# Altium PCB UniversalFullBridge.PcbDoc
Units mm, origin at the board's own origin, x right, y up, seen from the top; angles counter-clockwise.
Board outline 137.92 x 67.82 mm, 2 copper layers (Top Layer, Bottom Layer); 64 components, 35 nets, 404 pads, 38 vias.
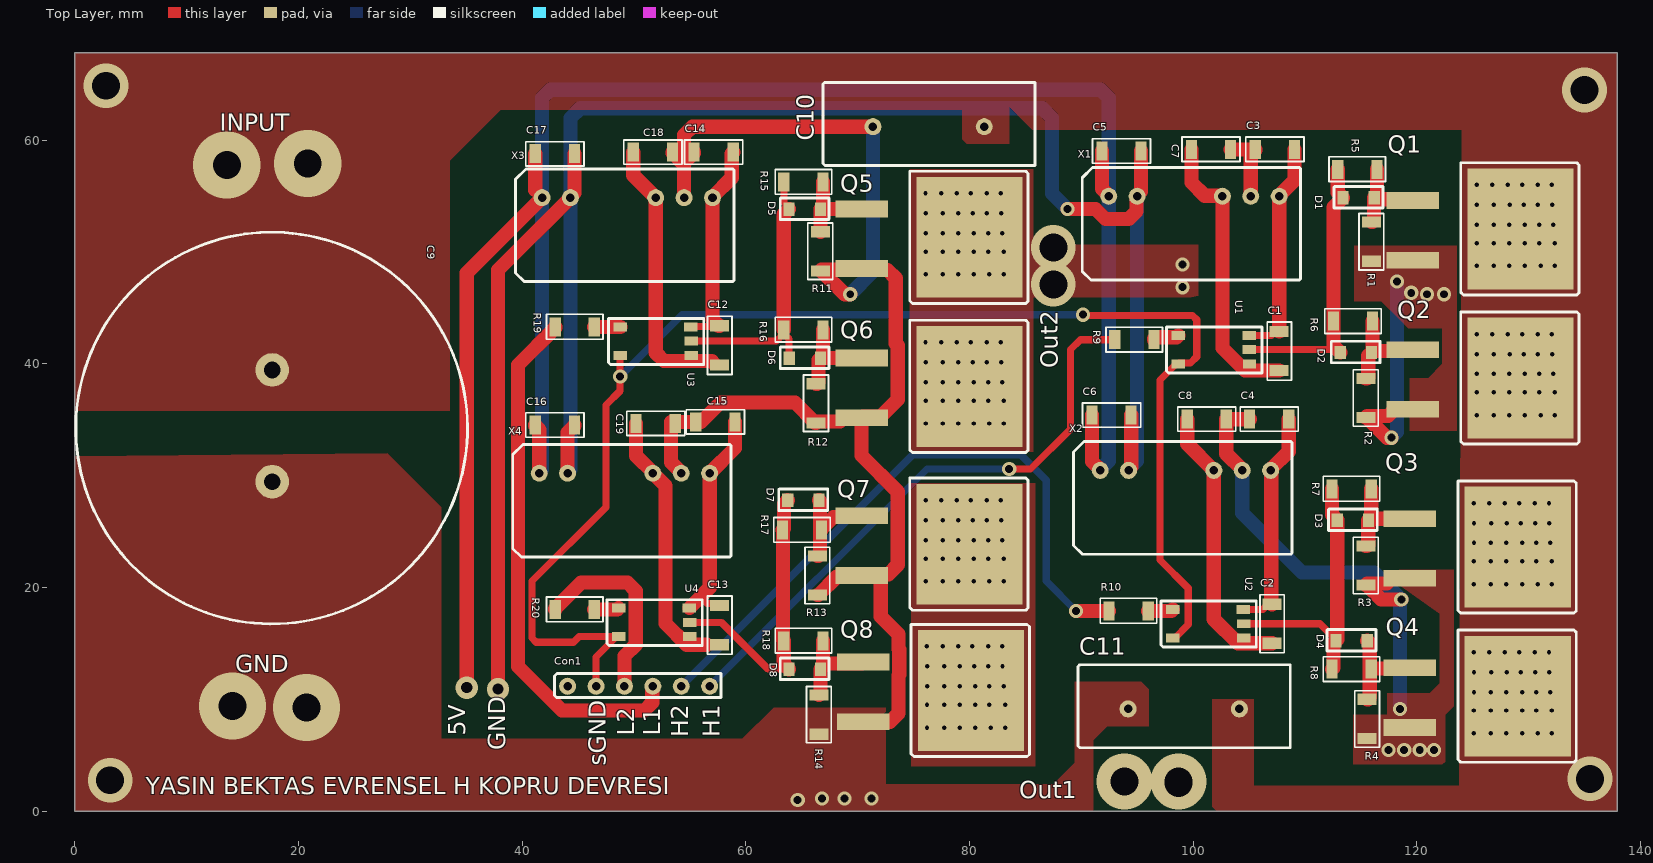
[diagram p0: Top Layer view]
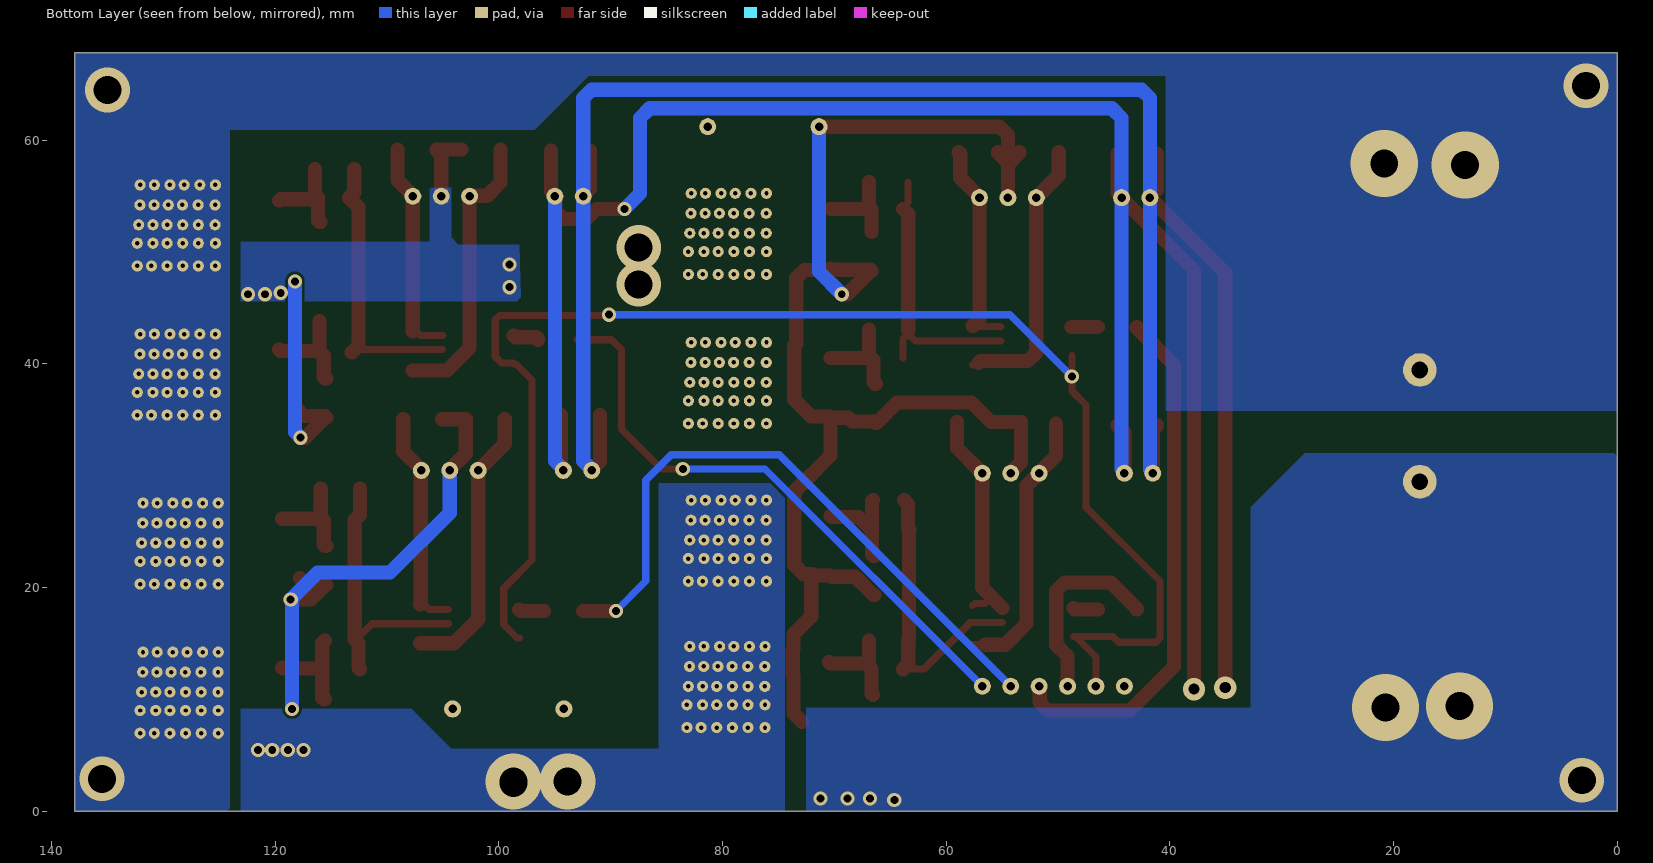
[diagram p1: Bottom Layer view, seen from below]
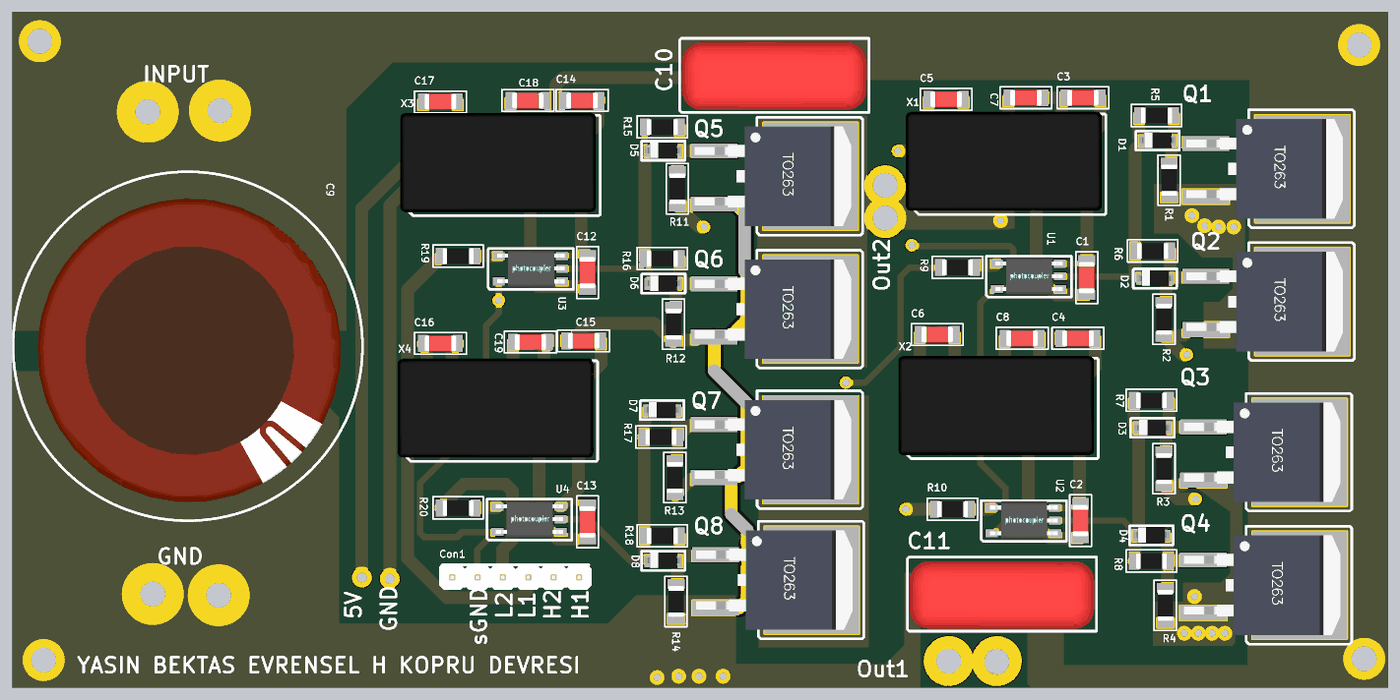
[diagram p2: 3D render of the assembled board from above, using the file's embedded part models]

## Layer stack, top to bottom
Top Solder: solder mask 0.0102, Solder Resist, Dk 3.5
Top Layer: signal copper 0.0356
Dielectric 1: dielectric 0.32, FR-4, Dk 4.8
Bottom Layer: signal copper 0.0356
Bottom Solder: solder mask 0.0102, Solder Resist, Dk 3.5

## Board outline
0,0 0,67.818 137.922,67.818 137.922,0

## Design rules (kind name [scope] priority, off if disabled: settings)
Clearance [All] p1: gap=0.254 ignorepadtopadclearanceinfootprint=FALSE except(0: Arc-Hole Track-Hole SMDPad-Hole THPad-Hole Via-Hole Fill-Hole Poly-Hole Region-Hole Text-Hole)
Height [All] p1: minheight=0 maxheight=2539.975 prefheight=12.7
PolygonConnect [All] p1: connectstyle=Direct reliefconductorwidth=0.254 reliefentries=4 polygonreliefangle="90 Angle" airgapwidth=0.254
RoutingVias [All] p1: holewidth=0.711 width=1.27 viastyle="Through Hole" minholewidth=0.711 minwidth=1.27 maxholewidth=0.711 maxwidth=1.27
SolderMaskExpansion [All] p1: expansion=0.102 istentingtop=FALSE
Width [All] p1: maxlimit=254 minlimit=0.254 preferedwidth=0.254 bottomlayer_maxwidth=25.4 minimp=50.000000 maximp=50.000000 favimp=50.000000
29 further rules are at their usual default settings.

## Components (designator, comment, footprint, x,y, rotation, side; value= is the part's Value field where it differs from the comment)
C1 "uF" C-1206W 107.696,41.148 r270 top
C2 "uF" C-1206W 107.061,16.764 r270 top
C3 "uF" C-1206W 107.315,59.182 r0 top
C4 "uF" C-1206W 106.807,35.052 r0 top
C5 "uF" C-1206W 93.599,59.055 r180 top
C6 "uF" C-1206W 92.71,35.433 r180 top
C7 "uF" C-1206W 101.6,59.182 r0 top
C8 "uF" C-1206W 101.219,35.052 r0 top
C9 "600v 220uF Capacitor" "600v Capacitor" 17.653,39.464 r270 top
C10 "Bulk Film Cap" "Bulk cappacitor" 81.324,61.214 r180 top
C11 "Bulk Film Cap" "Bulk cappacitor" 104.14,9.144 r180 top
C12 "uF" C-1206W 57.658,41.656 r270 top
C13 "uF" C-1206W 57.658,16.637 r270 top
C14 "uF" C-1206W 57.122,58.928 r0 top
C15 "uF" C-1206W 57.277,34.798 r0 top
C16 "uF" C-1206W 42.926,34.544 r180 top
C17 "uF" C-1206W 42.926,58.801 r180 top
C18 "uF" C-1206W 51.689,58.928 r0 top
C19 "uF" C-1206W 51.943,34.671 r0 top
Con1 "5 pin connector" pinheader 56.769,11.176 r180 top
D1 "B5819" B5819 113.405,54.864 r0 top
D2 "B5819" B5819 113.151,41.021 r0 top
D3 "B5819" B5819 112.897,26.035 r0 top
D4 "B5819" B5819 112.776,15.24 r0 top
D5 "B5819" B5819 63.875,53.848 r0 top
D6 "B5819" B5819 63.881,40.513 r0 top
D7 "B5819" B5819 63.754,27.813 r0 top
D8 "B5819" B5819 63.875,12.7 r0 top
Q1 "To263Mosfet" To263Mosfet 119.634,54.61 r0 top
Q2 "To263Mosfet" To263Mosfet 119.634,41.275 r0 top
Q3 "To263Mosfet" To263Mosfet 119.38,26.162 r0 top
Q4 "To263Mosfet" To263Mosfet 119.38,12.827 r0 top
Q5 "To263Mosfet" To263Mosfet 70.355,53.858 r0 top
Q6 "To263Mosfet" To263Mosfet 70.355,40.523 r0 top
Q7 "To263Mosfet" To263Mosfet 70.358,26.416 r0 top
Q8 "To263Mosfet" To263Mosfet 70.485,13.335 r0 top
R1 "R-1206" R-1206W 115.951,50.927 r90 top
R2 "R-1206" R-1206W 115.443,36.957 r90 top
R3 "R-1206" R-1206W 115.443,21.971 r90 top
R4 "R-1206" R-1206W 115.57,8.255 r90 top
R5 "R-1206" R-1206W 114.681,57.404 r0 top
R6 "R-1206" R-1206W 114.3,43.815 r0 top
R7 "R-1206" R-1206W 114.173,28.829 r0 top
R8 "R-1206" R-1206W 114.173,12.7 r0 top
R9 "R-1206" R-1206W 94.742,42.164 r0 top
R10 "R-1206" R-1206W 94.234,17.907 r0 top
R11 "R-1206" R-1206W 66.675,50.066 r90 top
R12 "R-1206" R-1206W 66.294,36.477 r90 top
R13 "R-1206" R-1206W 66.421,21.082 r90 top
R14 "R-1206" R-1206W 66.548,8.636 r90 top
R15 "R-1206" R-1206W 65.151,56.261 r0 top
R16 "R-1206" R-1206W 65.151,43.053 r0 top
R17 "R-1206" R-1206W 65.024,25.146 r0 top
R18 "R-1206" R-1206W 65.151,15.24 r0 top
R19 "R-1206" R-1206W 44.704,43.307 r0 top
R20 "R-1206" R-1206W 44.704,18.034 r0 top
U1 "TLP152" tlp152 98.679,42.545 r270 top
U2 "TLP152" tlp152 98.171,18.034 r270 top
U3 "TLP152" tlp152 48.768,43.307 r270 top
U4 "TLP152" tlp152 48.63,18.161 r270 top
X1 "5/20-5" "sip7DCDC converter" 92.456,54.991 r0 top
X2 "5/20-5" "sip7DCDC converter" 91.694,30.48 r0 top
X3 "5/20-5" "sip7DCDC converter" 41.783,54.864 r0 top
X4 "5/20-5" "sip7DCDC converter" 41.529,30.226 r0 top

## Footprints (in the part's own frame and the unit in brackets; to place one, negate y for a bottom-side part, rotate by r counter-clockwise, add the part's x,y. Pads: shape width x height; smd on the part's side, far side on the other; paste and mask are expansions set on the pad)
"600v Capacitor" [mm]
  round 3 hole 1.5: 1(0,0) 2(10,0)
  silkscreen extent -12.31,-17.56 22.71,17.46, body extent -15.93,-21.43 27.18,21.68, height 49.61
B5819 [mm]
  rect 1x1.2 smd: 1(0,0) 2(2.8,0)
  silkscreen extent -0.8,-0.92 3.57,1, body extent -0.45,-0.72 3.25,0.88, height 1.28
"Bulk cappacitor" [mil]
  round 60 hole 30: 1(0,0) 2(391.73,0)
  silkscreen extent -179,-156 568,137, body extent -169,-140 559,128, height 872
C-1206W [mm] "capacitor 1206 wave soldering"
  rect 1x1.7 smd: 1(-1.75,0) 2(1.75,0)
  silkscreen extent -2.6,-1.07 2.6,1.1, body extent -1.6,-0.8 1.6,0.8, height 1
pinheader [mil]
  round 60 hole 30: 1(0,0) 2(100,0) 3(200,0) 4(300,0) 5(400,0) 6(500,0)
  silkscreen extent -40,-45 546,39, body extent -51,-45 549,53, height 312
R-1206W [mm] "resistor 1206 wave soldering"
  rect 1x1.7 smd: 1(-1.75,0) 2(1.75,0)
  silkscreen extent -2.52,-1.1 2.52,1.12, body extent -1.55,-0.77 1.55,0.78, height 0.55
"sip7DCDC converter" [mil]
  round 60 hole 30: 1(0,0) 2(100,0) 5(400,0) 6(500,0) 7(600,0)
  silkscreen extent -94,-295 675,101, body extent -114,-281 659,110, height 499
tlp152 [mm]
  rect 0.8x1.2 smd: 1(0,0) 3(2.54,0) 4(2.54,6.361) 5(1.27,6.349) 6(0,6.324)
  silkscreen extent -0.75,-1.05 3.35,7.47, body extent -0.65,-0.16 3.15,6.61, height 2.11
To263Mosfet [mm]
  rect 4.7x1.5 smd: 1(0,0) 3(0,-5.334)
  round 1 hole 0.4: 2(5.715,1.397) 2(5.718,-5.852) 2(5.718,-3.82) 2(5.739,-2.169) 2(5.739,-0.391) 2(7.112,1.397) 2(7.242,-5.852) 2(7.242,-3.82) 2(7.242,-2.169) 2(7.263,-0.391) 2(8.509,1.397) 2(8.639,-5.852) 2(8.639,-3.82) 2(8.639,-2.169) 2(8.66,-0.391) 2(9.779,1.397) 2(9.93,-0.391) 2(10.036,-5.852) 2(10.036,-3.82) 2(10.036,-2.169) 2(11.176,1.397) 2(11.2,-0.391) 2(11.306,-3.82) 2(11.306,-2.169) 2(11.433,-5.852) 2(12.446,1.397) 2(12.47,-0.391) 2(12.576,-2.169) 2(12.703,-5.852) 2(12.703,-3.82)
  rect 9.5x10.8 smd: 2(9.652,-2.54)
  silkscreen extent 4.3,-8.45 14.87,3.37, body extent -1.94,-7.54 13.73,2.46, height 4.81

## Part data
C1 C2 C3 C4 C5 C6 C7 C8 C12 C13 C14 C15 C16 C17 C18 C19: library part C-1206
C10 C11: library part "3300pF Bulk Capacitor"
R1 R2 R3 R4 R5 R6 R7 R8 R9 R10 R11 R12 R13 R14 R15 R16 R17 R18 R19 R20: "Res1206"
X1 X2 X3 X4: library part "DC/DC Coınverter"

## Via types
v1: diameter 1.27, hole 0.711, Top Layer to Bottom Layer, 23 vias
v2: diameter 4, hole 2.5, Top Layer to Bottom Layer, 7 vias
v3: diameter 6, hole 2.5, Top Layer to Bottom Layer, 4 vias
v4: diameter 2, hole 1, Top Layer to Bottom Layer, 2 vias
v5: diameter 5, hole 2.5, Top Layer to Bottom Layer, 2 vias

## Nets (pads, with @x,y where several pads share a name; then routed paths per layer and width w, separated by ;. In a path a pad name is that pad's centre, name@x,y a point inside that pad or via, vN(x,y) a via of type N, cw(c..) or ccw(c..) an arc to the next point about the centre after c; other vN are vias at no path point)
5vGND: C5.1 C6.1 C16.1 C17.1 X1.2 X2.2 X3.2 X4.2 | length 181.9
  Top Layer w1.27: v4(37.846,10.922) 37.846,48.387 X3.2 44.323,54.933 44.676,55.286 C17.1 ; X4.2 44.069,33.857 44.676,34.464 C16.1 ; v1(88.773,53.848) 91.264,53.848 92.153,52.959 94.252,52.959 94.947,53.654 94.947,54.942 X1.2 94.996,55.06 95.349,55.413 C5.1 ; X2.2 94.234,30.549 94.46,30.775 C6.1
  Bottom Layer w1.27: X4.2 44.069,30.295 44.323,30.549 X3.2 44.323,61.994 45.194,62.865 86.514,62.865 87.385,61.994 87.385,55.236 v1(88.773,53.848) ; X2.2 94.234,30.549 94.996,31.311 X1.2
+5v: C5.2 C6.2 C16.2 C17.2 X1.1 X2.1 X3.1 X4.1 | length 182.4
  Top Layer w1.27: v4(35.052,11.049) 35.052,48.133 X3.1 ; C16.2 41.176,34.464 41.529,34.111 X4.1 ; 41.176,55.54 C17.2 ; C6.2 90.96,31.283 91.694,30.549 X2.1 ; C5.2 91.849,55.667 92.456,55.06 X1.1
  Bottom Layer w1.27: X4.1 41.529,30.295 41.783,30.549 X3.1 41.783,63.772 42.527,64.516 91.712,64.516 92.456,63.772 X1.1 92.456,31.311 91.694,30.549 X2.1
-5v1: C1.2 C7.1 U1.4 X1.5 | length 25.7
  Top Layer w1.27: C7.1 99.85,56.233 101.043,55.04 102.567,55.04 X1.5 102.616,41.43 104.648,39.398 C1.2
-5v2: C2.2 C8.1 U2.4 X2.5 | length 25
  Top Layer w1.27: C8.1 99.469,32.865 X2.5 101.854,17.173 104.013,15.014 C2.2
-5v3: C12.2 C18.1 U3.4 X3.5 | length 24.9
  Top Layer w0.635: C12.2@57.125,40.089 57.308,39.906 C12.2
  Top Layer w1.27: C18.1 49.939,56.868 X3.5 51.943,41.003 52.687,40.259 56.955,40.259 C12.2@57.125,40.089
-5v4: C13.2 C19.1 U4.4 X4.5 | length 24.6
  Top Layer w0.635: 56.515,14.887 C13.2
  Top Layer w1.27: C19.1 50.193,31.791 51.689,30.295 X4.5 52.819,29.096 52.819,16.794 54.726,14.887 56.515,14.887
Com1: C3.1 C7.2 Q1.3 Q2.3 Q5.2 Q6.2 R1.1 R2.1 X1.6 | length 26.7
  Top Layer w1.27: C7.2 C3.1 105.565,59.102 105.156,58.693 X1.6 ; v1(117.729,33.401) 117.329,33.401 115.523,35.207 R2.1 115.578,35.342 117.435,35.342 Q2.3@118.034,35.941
  Bottom Layer w1.27: v1(117.729,33.401) 118.237,33.909 v1(118.237,47.371)
  other v1: 120.904,46.228 122.428,46.228 119.507,46.355 99.06,46.863 99.06,48.895
  other v2: 87.503,47.117 87.503,50.419
Com2: C4.1 C8.2 Q3.3 Q4.3 Q7.2 Q8.2 R3.1 R4.1 X2.6 | length 44.6
  Top Layer w1.27: X2.6 104.394,30.549 102.969,31.974 C8.2 C4.1 ; Q3.3@117.78,20.828 117.308,20.356 115.578,20.356 R3.1 115.523,20.221 116.821,18.923 v1(118.618,18.923)
  Bottom Layer w1.27: X2.6 104.394,26.67 109.728,21.336 116.205,21.336 v1(118.618,18.923) 118.491,18.796 v1(118.491,9.144)
  other v1: 117.475,5.461 118.872,5.461 120.269,5.461 121.539,5.461
  other v2: 98.679,2.54
  other v5: 93.853,2.667 98.679,2.667
GND: C9.2 C10.2 C11.2 C14.1 C15.1 C18.2 C19.2 Q5.3 Q6.3 Q7.3 Q8.3 R11.1 R12.1 R13.1 R14.1 X3.6 X4.6 | length 127.6
  Top Layer w1.27: C18.2 53.439,58.848 54.483,57.804 ; X4.6 54.229,30.295 53.312,31.212 53.312,34.798 C15.1 55.987,34.798 57.726,36.537 64.404,36.537 66.214,34.727 R12.1 66.429,34.862 68.428,34.862 68.755,35.189 Q6.3 ; X3.6 54.483,57.804 ; C14.1 55.372,58.848 54.483,57.959 ; R13.1 66.501,19.332 68.136,20.967 70.243,20.967 Q7.3 71.958,21.082 72.073,20.967 72.073,17.417 73.66,15.83 73.66,14.517 73.724,14.453 73.724,12.217 73.66,12.153 73.66,8.763 72.898,8.001 ; v1(69.342,46.228) 68.843,46.228 66.755,48.316 R11.1 66.779,48.42 70.251,48.42 Q5.3 70.47,48.409 72.662,48.409 73.406,47.665 73.406,41.829 73.594,41.641 73.594,36.828 72.07,35.304 70.47,35.304 Q6.3 ; C10.2 55.227,61.214 54.483,60.47 54.483,57.959 ; Q7.3@71.958,21.197 72.759,21.197 73.597,22.035 73.597,28.565 70.355,31.807 Q6.3 ; 54.483,57.804 54.483,57.959
  Bottom Layer w1.27: v1(69.342,46.228) 71.374,48.26 C10.2
  other v1: 64.643,1.016 66.802,1.143 68.834,1.143 71.247,1.143
  other v2: 3.164,2.77
  other v3: 20.701,9.271 14.097,9.398
H1: Con1.1 R9.1 | length 53.2
  Top Layer w0.635: v1(83.555,30.607) 85.471,30.607 89.027,34.163 89.027,41.275 89.916,42.164 R9.1
  Bottom Layer w0.635: Con1.1 76.2,30.607 v1(83.555,30.607)
H2: Con1.2 R10.1 | length 57.9
  Top Layer w1.27: v1(89.535,17.907) R10.1
  Bottom Layer w0.635: Con1.2 74.93,31.877 84.591,31.877 86.868,29.6 86.868,20.574 v1(89.535,17.907)
L1: Con1.3 R19.1 | length 47.2
  Top Layer w1.27: R19.1 42.954,43.227 39.624,39.897 39.624,12.954 43.561,9.017 50.945,9.017 51.64,9.712 51.64,11.127 Con1.3
L2: Con1.4 R20.1 | length 17.5
  Top Layer w1.27: R20.1 42.954,18.114 45.287,20.447 49.41,20.447 50.154,19.703 50.154,14.888 49.149,13.883 Con1.4
NetC1_1: C1.1 C3.2 U1.6 X1.7 | length 19.7
  Top Layer w0.635: U1.6 106.993,42.545 107.346,42.898 C1.1
  Top Layer w1.27: C1.1 X1.7 107.696,55.058 109.065,56.427 C3.2
NetC2_1: C2.1 C4.2 U2.6 X2.7 | length 20
  Top Layer w0.635: U2.6 106.231,18.034 106.711,18.514 C2.1
  Top Layer w1.27: C2.1 106.983,18.592 106.983,30.431 X2.7 106.934,30.549 108.557,32.172 C4.2
NetC9_1: C9.1 C10.1 C11.1 Q1.2 Q2.2 Q3.2 Q4.2
  other v2: 135.498,2.897 134.99,64.492 2.783,64.873
  other v3: 13.589,57.785 20.828,57.912
NetC12_1: C12.1 C14.2 U3.6 X3.7 | length 19.2
  Top Layer w0.635: U3.6 55.142,43.356 57.608,43.356 C12.1
  Top Layer w1.27: C12.1 57.578,43.406 57.023,43.961 X3.7 57.023,54.933 58.737,56.647 58.737,58.793 C14.2
NetC13_1: C13.1 C15.2 U4.6 X4.7 | length 21.4
  Top Layer w0.635: U4.6 55.154,18.161 55.789,18.796 56.315,18.796 56.542,18.57 57.475,18.57 C13.1
  Top Layer w1.27: U4.6@54.954,18.18 56.769,19.995 X4.7 59.027,32.484 C15.2
NetD1_1: D1.1 D2.1 R5.1 R6.1 U1.5 | length 25.1
  Top Layer w0.635: U1.5 D2.1@112.897,41.275
  Top Layer w1.27: R5.1 112.931,55.338 D1.1 112.55,54.009 R6.1 112.55,41.622 112.897,41.275 D2.1
NetD1_2: D1.2 Q1.1 R1.2 R5.2 | length 8.5
  Top Layer w1.27: R1.2 116.031,52.677 116.166,52.812 116.166,54.825 D1.2 ; R5.2 116.431,55.09 D1.2 ; Q1.1 119.519,54.725 116.344,54.725 D1.2
NetD2_2: D2.2 Q2.1 R2.2 R6.2 | length 9.1
  Top Layer w1.27: R2.2 115.523,38.707 115.658,38.842 115.658,40.728 D2.2 D2.2@116.05,41.12 ; R6.2 D2.2@116.05,41.12 ; Q2.1 119.519,41.16 116.09,41.16 D2.2@116.05,41.12
NetD3_1: D3.1 D4.1 R7.1 R8.1 U2.5 | length 25.5
  Top Layer w0.635: U2.5 111.352,16.764 112.776,15.34 D4.1
  Top Layer w1.27: R8.1 112.558,12.835 112.558,15.022 D4.1 112.897,15.361 D3.1 112.423,26.509 R7.1
NetD3_2: D3.2 Q3.1 R3.2 R7.2 | length 8.9
  Top Layer w1.27: R3.2 115.523,23.721 115.658,23.856 115.658,25.996 D3.2 D3.2@115.824,26.162 ; R7.2 115.923,26.261 D3.2@115.824,26.162 ; Q3.1 D3.2@115.824,26.162
NetD4_2: D4.2 Q4.1 R4.2 R8.2 | length 9.1
  Top Layer w1.27: R4.2 115.65,10.005 115.788,10.143 115.788,12.565 R8.2 ; D4.2 115.788,15.028 115.788,12.835 R8.2 ; Q4.1 119.316,12.763 115.987,12.763 R8.2
NetD5_1: D5.1 D6.1 R15.1 R16.1 U3.5 | length 24.1
  Top Layer w0.635: U3.5 62.735,42.037 R16.1@63.401,42.703 ; R16.1 R16.1@63.401,42.703 ; D5.1@63.401,54.422 R15.1 ; D6.1 63.881,42.223 R16.1@63.401,42.703
  Top Layer w1.27: R16.1 63.401,53.374 D5.1
NetD5_2: D5.2 Q5.1 R11.2 R15.2 | length 8.2
  Top Layer w1.27: R11.2 D5.2 D5.2@66.685,53.858 ; R15.2 66.901,54.074 D5.2@66.685,53.858 ; Q5.1 D5.2@66.685,53.858
NetD6_2: D6.2 Q6.1 R12.2 R16.2 | length 8.8
  Top Layer w1.27: R12.2 66.374,38.227 66.509,38.362 66.509,40.341 D6.2 D6.2@66.691,40.523 ; R16.2 66.901,40.733 D6.2@66.691,40.523 ; Q6.1 D6.2@66.691,40.523
NetD7_1: D7.1 D8.1 R17.1 R18.1 U4.5 | length 26.2
  Top Layer w0.635: U4.5 57.812,16.891 62.003,12.7 D8.1
  Top Layer w1.27: D7.1 63.409,27.468 63.409,25.281 R17.1 63.338,25.082 63.338,15.303 R18.1 63.401,13.174 D8.1
NetD7_2: D7.2 Q7.1 R13.2 R17.2 | length 9.4
  Top Layer w1.27: R13.2 66.501,22.832 66.639,22.97 66.639,25.011 R17.2 ; D7.2 66.639,27.728 66.639,25.281 R17.2 ; Q7.1 70.243,26.301 67.849,26.301 66.774,25.226 R17.2
NetD8_2: D8.2 Q8.1 R14.2 R18.2 | length 8.8
  Top Layer w1.27: R14.2 66.675,10.513 D8.2 D8.2@66.901,12.926 ; R18.2 D8.2@66.901,12.926 ; Q8.1 70.37,13.22 67.195,13.22 D8.2@66.901,12.926
NetR9_2: R9.2 U1.1 | length 2.4
  Top Layer w1.27: R9.2 96.492,42.244 96.627,42.379 98.513,42.379 U1.1
NetR10_2: R10.2 U2.1 | length 2.2
  Top Layer w1.27: R10.2 98.044,17.907 U2.1
NetR19_2: R19.2 U3.1 | length 2.3
  Top Layer w1.27: R19.2 U3.1
NetR20_2: R20.2 U4.1 | length 2.2
  Top Layer w1.27: R20.2 48.503,18.034 U4.1
sGND: Con1.5 U1.3 U2.3 U3.3 U4.3 | length 128.2
  Top Layer w0.635: Con1.5 46.609,13.8 U4.3@48.43,15.621 ; U4.3 U4.3@48.43,15.621 ; U3.3 v1(48.768,38.862) 48.768,37.592 47.498,36.322 47.498,27.178 40.894,20.574 40.894,15.485 41.266,15.113 44.594,15.113 45.102,15.621 U4.3@48.43,15.621 ; v1(90.156,44.4) 90.233,44.323 99.958,44.323 100.33,43.951 100.33,40.64 99.778,40.088 98.762,40.088 U1.3 98.479,40.005 97.028,38.554 97.028,22.479 99.568,19.939 99.568,16.691 98.371,15.494 U2.3
  Bottom Layer w0.635: v1(48.768,38.862) 54.306,44.4 v1(90.156,44.4)
pads on no net: Con1.6

## Polygon pours and split planes (outlines as drawn)
GND on Top Layer "GND_L01_P005" (solid, pour order 5): 91.059,0 91.059,6.35 92.329,7.62 96.012,7.62 96.012,10.922 95.377,11.557 89.408,11.557 89.408,4.318 87.503,2.413 72.517,2.413 72.517,9.271 62.484,9.271 59.69,6.477 32.766,6.477 32.766,27.178 27.94,32.004 0,31.75 0,0
NetC9_1 on Top Layer "NETC9_1_L01_P000" (solid, pour order 0): 102.108,0 101.727,0.381 101.727,10.033 105.41,10.033 105.41,2.286 123.788,2.286 124.008,60.96 85.598,60.96 83.566,62.992 83.566,59.69 79.756,59.69 79.375,60.071 79.375,62.738 38.1,62.738 33.528,58.166 33.528,35.814 0,35.814 0,67.818 123.062,67.818 123.19,67.69 123.19,67.818 137.922,67.818 137.922,0
Com1 on Top Layer "COM1_L01_P009" (solid, pour order 9): 123.571,34.036 119.38,34.036 119.38,38.735 121.031,38.735 122.301,40.005 122.301,43.18 119.253,43.18 116.84,45.593 114.427,45.593 114.427,50.546 123.571,50.546
Com2 on Top Layer "COM2_L01_P004" (solid, pour order 4): 122.555,8.636 123.317,9.398 123.317,21.59 118.11,21.59 118.11,20.447 122.047,17.668 122.047,11.43 121.158,10.541 117.348,10.541 117.348,8.636 114.3,8.636 114.3,4.191 122.301,4.191 122.555,4.445
Com2 on Top Layer "COM2_L01_P002" (solid, pour order 2): 74.803,29.337 85.872,29.337 85.872,4.039 74.803,4.039
Com1 on Top Layer "COM1_L01_P001" (solid, pour order 1): 85.725,50.8 85.852,50.673 100.457,50.673 100.457,46.101 99.822,45.974 99.06,45.974 85.725,45.974 85.725,32.131 74.676,32.131 74.676,57.404 85.725,57.404
GND on Bottom Layer "GND_L02_P012" (solid, pour order 12): 0,31.75 0.254,32.004 27.94,32.004 32.766,27.178 32.766,9.271 62.103,9.271 72.517,9.271 72.517,0 0,0
NetC9_1 on Bottom Layer "NETC9_1_L02_P011" (solid, pour order 11): 0,35.814 0,67.818 137.922,67.818 137.922,0 124.333,0 124.079,0.254 124.079,60.96 96.774,60.96 91.948,65.786 40.386,65.786 40.386,65.151 40.386,35.814
Com1 on Bottom Layer "COM1_L02_P010" (solid, pour order 10): 98.171,50.673 103.632,50.673 104.267,51.308 104.267,55.753 106.045,55.753 106.172,55.626 106.172,50.927 123.063,50.927 123.063,45.593 98.425,45.593 98.044,45.974
Com2 on Bottom Layer "COM2_L02_P003" (solid, pour order 3): 74.422,29.337 74.422,0 123.19,0 123.063,0.127 123.063,9.144 107.823,9.144 104.267,5.588 85.725,5.588 85.725,29.337

## Silkscreen, mask and mechanical layers (free items; w line width, h text height)
Top Overlay:
  text "INPUT" at 12.954,60.833 h1.52
  text "Out2" at 87.884,39.624 h1.52 r90
  text "GND" at 14.351,12.446 h1.52
  text "L2" at 50.043,6.759 h1.52 r90
  text "L1" at 52.329,6.759 h1.52 r90
  text "5V" at 34.925,6.731 h1.52 r90
  text "H2" at 54.869,6.632 h1.52 r90
  text "H1" at 57.663,6.632 h1.52 r90
  text "GND" at 38.481,5.461 h1.52 r90
  text "sGND" at 47.498,4.064 h1.52 r90
  text "YASIN BEKTAS EVRENSEL H KOPRU DEVRESI" at 6.35,1.524 h1.52
  text "Out1" at 84.455,1.143 h1.52
Mechanical 1:
  the board outline again, w0.254